# Altium PCB Copy of main - shifted.PcbDoc (part 13 of 15)
Units mil, origin at the board's own origin, x right, y up, seen from the top; angles counter-clockwise.
Board outline 8394.55 x 5164.44 mil, 7 copper layers (Top Layer 1, Layer 2, Layer 3, Unused, Layer 4_pow, Layer 5_gnd, Bottom 6+gnd), stack 46.112 mil thick; 363 components, 409 nets, 1750 pads, 991 vias.
Unrouted connection lines stored in the file: 111.
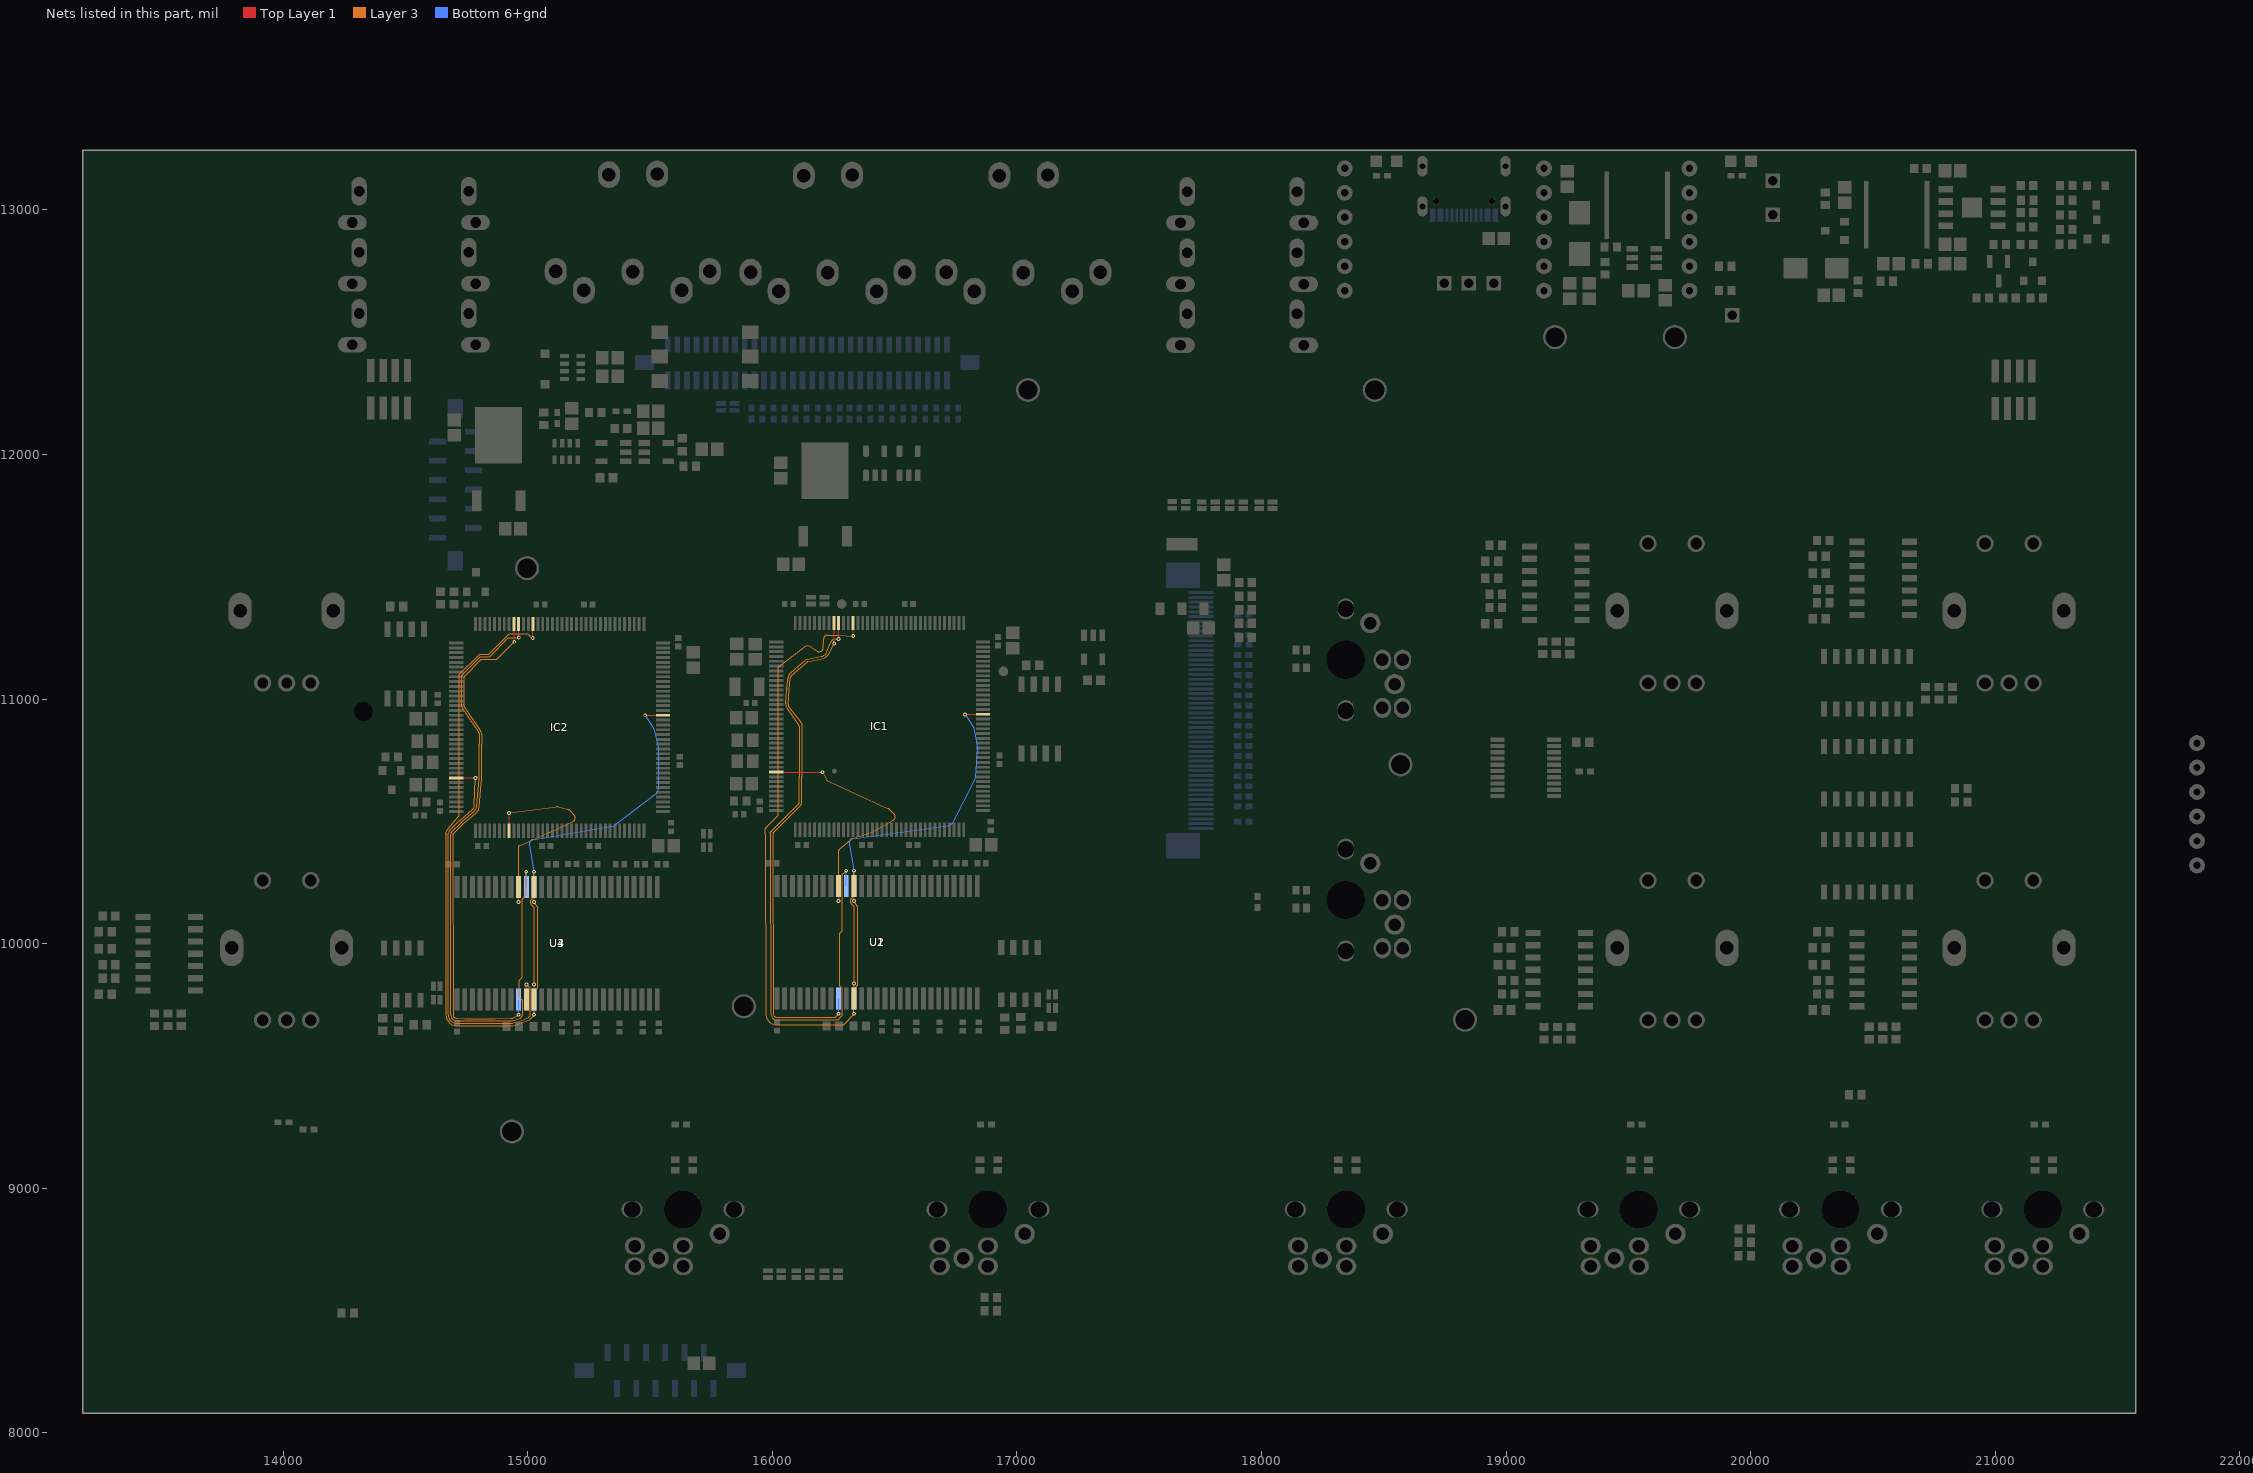
[diagram p16: the nets of this part, all layers, seen from the top]

## Via types
v1: diameter 15.75, hole 7.87, Top Layer 1 to Bottom 6+gnd, tented both sides, 923 vias
v2: diameter 27.56, hole 11.81, Top Layer 1 to Bottom 6+gnd, 45 vias
v3: diameter 23.62/23.62/23.62/23.62/23.62/23.62/23.62 (per signal layer), hole 12, Top Layer 1 to Bottom 6+gnd, tented top, 10 vias
v4: diameter 15.75, hole 7.87, Top Layer 1 to Bottom 6+gnd, 10 vias
v5: diameter 23.62/23.62/23.62/23.62/23.62/23.62/23.62 (per signal layer), hole 12, Top Layer 1 to Bottom 6+gnd, tented bottom, 3 vias

## Nets (pads, with @x,y where several pads share a name; then routed paths per layer and width w, separated by ;. In a path a pad name is that pad's centre, name@x,y a point inside that pad or via, vN(x,y) a via of type N, cw(c..) or ccw(c..) an arc to the next point about the centre after c; other vN are vias at no path point) (continued)
SDCKE_1_6: IC1.135 U2.37 | length 4722.9
  Top Layer 1 w5: v1(16270.57,11246.07) 16270.7,11246.2 16270.7,11311.45 IC1.135@16270.83,11311.57
  Layer 3 w5: 15993.16,10458.03 16108.07,10572.94 ; 16108.57,11136.34 16072.48,11104.85 ; 16108.58,11136.34 16131.89,11156.63 cw(c16148.55,11137.5) 16143.19,11162.3 16199.56,11174.48 ; 16109.53,10682.18 cw(c16094.16,10682.09) 16109.53,10681.99 ; 16268.26,9689.59 16285.8,9707.13 16285.8,9814.04 ; v1(16270.57,11246.07) 16250.25,11242.36 ccw(c16253.01,11227.24) 16238.61,11232.6 16225.24,11196.71 ; 16276.06,9827.93 ccw(c16281.06,9827.93) 16277.51,9824.4 ; v1(16301.92,10298.31) 16285.8,10282.18 16285.8,10052.46 16276.06,10042.72 16276.06,9827.92 ; 15991.7,10450.32 cw(c16001.7,10450.34) 15991.7,10450.45 ; 15991.7,10450.32 cw(c16001.7,10450.34) 15991.7,10450.45 ; 15991.7,10450.32 cw(c16001.7,10450.34) 15991.7,10450.45 ; 15991.7,10450.32 cw(c16001.7,10450.34) 15991.7,10450.45 ; 15991.7,10450.32 cw(c16001.7,10450.34) 15991.7,10450.45 ; 15991.7,10450.32 cw(c16001.7,10450.34) 15991.7,10450.45 ; 15991.7,10450.32 cw(c16001.7,10450.34) 15991.7,10450.45 ; 15991.7,10450.32 cw(c16001.7,10450.34) 15991.7,10450.45 ; 15991.7,10450.32 15993.2,9713.56 ; 15991.7,10450.45 15991.72,10454.56 ; 15991.72,10454.56 cw(c15996.72,10454.52) 15993.14,10458.01 ; 15991.72,10454.56 cw(c15996.72,10454.52) 15993.14,10458 ; 15991.72,10454.56 cw(c15996.72,10454.52) 15993.14,10458 ; 15991.72,10454.56 cw(c15996.72,10454.52) 15993.14,10458 ; 15991.72,10454.56 cw(c15996.72,10454.52) 15993.14,10458 ; 15991.72,10454.56 cw(c15996.72,10454.52) 15993.14,10458 ; 15991.72,10454.56 cw(c15996.72,10454.52) 15993.14,10458 ; 15991.72,10454.56 cw(c15996.72,10454.52) 15993.14,10458 ; 15991.72,10454.56 cw(c15996.72,10454.52) 15993.14,10458 ; 15991.72,10454.56 cw(c15996.72,10454.52) 15993.14,10458 ; 15991.72,10454.56 cw(c15996.72,10454.52) 15993.14,10458 ; 15991.72,10454.56 cw(c15996.72,10454.52) 15993.14,10458 ; 15991.72,10454.56 cw(c15996.72,10454.52) 15993.14,10458 ; 15991.72,10454.56 cw(c15996.72,10454.52) 15993.14,10458 ; 15991.72,10454.56 cw(c15996.72,10454.52) 15993.14,10458 ; 15991.72,10454.56 cw(c15996.72,10454.52) 15993.14,10458 ; 15993.2,9713.57 ccw(c16018.57,9713.62) 16018.47,9688.24 ; 15993.2,9713.57 ccw(c16018.57,9713.62) 16018.47,9688.24 ; 15993.2,9713.57 ccw(c16018.57,9713.62) 16018.47,9688.24 ; 15993.2,9713.57 ccw(c16018.57,9713.62) 16018.47,9688.24 ; 15993.2,9713.57 ccw(c16018.57,9713.62) 16018.47,9688.24 ; 15993.2,9713.57 ccw(c16018.57,9713.62) 16018.47,9688.24 ; 15993.2,9713.57 ccw(c16018.57,9713.62) 16018.47,9688.24 ; 15993.2,9713.57 ccw(c16018.57,9713.62) 16018.47,9688.24 ; 15993.2,9713.57 ccw(c16018.57,9713.62) 16018.47,9688.24 ; 15993.2,9713.57 ccw(c16018.57,9713.62) 16018.47,9688.24 ; 15993.2,9713.57 ccw(c16018.57,9713.62) 16018.47,9688.24 ; 15993.2,9713.57 ccw(c16018.57,9713.62) 16018.47,9688.24 ; 15993.2,9713.57 ccw(c16018.57,9713.62) 16018.47,9688.24 ; 15993.2,9713.57 ccw(c16018.57,9713.62) 16018.47,9688.24 ; 15993.2,9713.57 ccw(c16018.57,9713.62) 16018.47,9688.24 ; 15993.2,9713.57 ccw(c16018.57,9713.62) 16018.47,9688.24 ; 16018.47,9688.24 16049.88,9688.13 16252.99,9688.13 16264.76,9688.16 ; 16053.89,10980.39 ccw(c16079.21,10978.64) 16058.42,10964.09 ; 16053.89,10980.39 ccw(c16079.21,10978.64) 16058.42,10964.09 ; 16053.89,10980.39 ccw(c16079.21,10978.64) 16058.42,10964.09 ; 16053.89,10980.39 ccw(c16079.21,10978.64) 16058.42,10964.09 ; 16053.89,10980.39 ccw(c16079.21,10978.64) 16058.42,10964.09 ; 16053.89,10980.39 ccw(c16079.21,10978.64) 16058.42,10964.09 ; 16053.89,10980.39 ccw(c16079.21,10978.64) 16058.42,10964.09 ; 16053.89,10980.39 ccw(c16079.21,10978.64) 16058.42,10964.09 ; 16053.89,10980.39 ccw(c16079.21,10978.64) 16058.42,10964.09 ; 16053.89,10980.39 ccw(c16079.21,10978.64) 16058.42,10964.09 ; 16053.89,10980.39 ccw(c16079.21,10978.64) 16058.42,10964.09 ; 16053.89,10980.39 ccw(c16079.21,10978.64) 16058.42,10964.09 ; 16053.89,10980.39 ccw(c16079.21,10978.64) 16058.42,10964.09 ; 16053.89,10980.39 ccw(c16079.21,10978.64) 16058.42,10964.09 ; 16053.89,10980.39 ccw(c16079.21,10978.64) 16058.42,10964.09 ; 16053.89,10980.39 ccw(c16079.21,10978.64) 16058.42,10964.09 ; 16053.89,10980.39 16058.06,11040.51 cw(c16093.35,11038.08) 16058.24,11042.42 16063.98,11088.82 ; 16058.42,10964.09 16107.6,10893.68 ccw(c16111.72,10896.51) 16108.11,10893.05 cw(c16104.49,10889.6) 16109.49,10889.6 16109.54,10682.17 ; 16063.98,11088.82 cw(c16089.16,11085.73) 16072.48,11104.85 ; 16063.98,11088.82 cw(c16089.16,11085.73) 16072.48,11104.85 ; 16063.98,11088.82 cw(c16089.16,11085.73) 16072.48,11104.85 ; 16063.98,11088.82 cw(c16089.16,11085.73) 16072.48,11104.85 ; 16063.98,11088.82 cw(c16089.16,11085.73) 16072.48,11104.85 ; 16063.98,11088.82 cw(c16089.16,11085.73) 16072.48,11104.85 ; 16063.98,11088.82 cw(c16089.16,11085.73) 16072.48,11104.85 ; 16063.98,11088.82 cw(c16089.16,11085.73) 16072.48,11104.85 ; 16063.98,11088.82 cw(c16089.16,11085.73) 16072.48,11104.85 ; 16063.98,11088.82 cw(c16089.16,11085.73) 16072.48,11104.85 ; 16063.98,11088.82 cw(c16089.16,11085.73) 16072.48,11104.85 ; 16063.98,11088.82 cw(c16089.16,11085.73) 16072.48,11104.85 ; 16063.98,11088.82 cw(c16089.16,11085.73) 16072.48,11104.85 ; 16063.98,11088.82 cw(c16089.16,11085.73) 16072.48,11104.85 ; 16063.98,11088.82 cw(c16089.16,11085.73) 16072.48,11104.85 ; 16063.98,11088.82 cw(c16089.16,11085.73) 16072.48,11104.85 ; 16108.1,10572.97 ccw(c16104.5,10576.44) 16109.5,10576.44 ; 16108.1,10572.97 ccw(c16104.5,10576.44) 16109.5,10576.44 ; 16108.1,10572.97 ccw(c16104.5,10576.44) 16109.5,10576.44 ; 16108.1,10572.97 ccw(c16104.5,10576.44) 16109.5,10576.44 ; 16108.1,10572.97 ccw(c16104.5,10576.44) 16109.5,10576.44 ; 16108.1,10572.97 ccw(c16104.5,10576.44) 16109.5,10576.44 ; 16108.1,10572.97 ccw(c16104.5,10576.44) 16109.5,10576.44 ; 16108.1,10572.97 ccw(c16104.5,10576.44) 16109.5,10576.44 ; 16108.1,10572.97 ccw(c16104.5,10576.44) 16109.5,10576.44 ; 16108.1,10572.97 ccw(c16104.5,10576.44) 16109.5,10576.44 ; 16108.1,10572.97 ccw(c16104.5,10576.44) 16109.5,10576.44 ; 16108.1,10572.97 ccw(c16104.5,10576.44) 16109.5,10576.44 ; 16108.1,10572.97 ccw(c16104.5,10576.44) 16109.5,10576.44 ; 16108.1,10572.97 ccw(c16104.5,10576.44) 16109.5,10576.44 ; 16108.1,10572.97 ccw(c16104.5,10576.44) 16109.5,10576.44 ; 16108.1,10572.97 ccw(c16104.5,10576.44) 16109.5,10576.44 ; 16109.5,10576.44 16109.54,10681.99 ; 16109.53,10681.99 ccw(c16094.16,10682.09) 16109.53,10682.17 ; 16109.53,10681.99 ccw(c16094.16,10682.09) 16109.53,10682.17 ; 16109.53,10681.99 ccw(c16094.16,10682.09) 16109.53,10682.17 ; 16109.53,10681.99 ccw(c16094.16,10682.09) 16109.53,10682.17 ; 16109.53,10681.99 ccw(c16094.16,10682.09) 16109.53,10682.17 ; 16109.53,10681.99 ccw(c16094.16,10682.09) 16109.53,10682.17 ; 16109.53,10681.99 ccw(c16094.16,10682.09) 16109.53,10682.17 ; 16109.53,10681.99 ccw(c16094.16,10682.09) 16109.53,10682.17 ; 16109.53,10681.99 ccw(c16094.16,10682.09) 16109.53,10682.17 ; 16109.53,10681.99 ccw(c16094.16,10682.09) 16109.53,10682.17 ; 16109.53,10681.99 ccw(c16094.16,10682.09) 16109.53,10682.17 ; 16109.53,10681.99 ccw(c16094.16,10682.09) 16109.53,10682.17 ; 16109.53,10681.99 ccw(c16094.16,10682.09) 16109.53,10682.17 ; 16109.53,10681.99 ccw(c16094.16,10682.09) 16109.53,10682.17 ; 16109.53,10681.99 ccw(c16094.16,10682.09) 16109.53,10682.17 ; 16199.56,11174.48 ccw(c16192.09,11209.06) 16225.24,11196.71 ; 16199.56,11174.48 ccw(c16192.09,11209.06) 16225.24,11196.71 ; 16199.56,11174.48 ccw(c16192.09,11209.06) 16225.24,11196.71 ; 16199.56,11174.48 ccw(c16192.09,11209.06) 16225.24,11196.71 ; 16199.56,11174.48 ccw(c16192.09,11209.06) 16225.24,11196.71 ; 16199.56,11174.48 ccw(c16192.09,11209.06) 16225.24,11196.71 ; 16199.56,11174.48 ccw(c16192.09,11209.06) 16225.24,11196.71 ; 16199.56,11174.48 ccw(c16192.09,11209.06) 16225.24,11196.71 ; 16199.56,11174.48 ccw(c16192.09,11209.06) 16225.24,11196.71 ; 16199.56,11174.48 ccw(c16192.09,11209.06) 16225.24,11196.71 ; 16199.56,11174.48 ccw(c16192.09,11209.06) 16225.24,11196.71 ; 16199.56,11174.48 ccw(c16192.09,11209.06) 16225.24,11196.71 ; 16199.56,11174.48 ccw(c16192.09,11209.06) 16225.24,11196.71 ; 16199.56,11174.48 ccw(c16192.09,11209.06) 16225.24,11196.71 ; 16199.56,11174.48 ccw(c16192.09,11209.06) 16225.24,11196.71 ; 16199.56,11174.48 ccw(c16192.09,11209.06) 16225.24,11196.71 ; 16264.76,9688.16 ccw(c16264.75,9693.16) 16268.23,9689.57 ; 16264.76,9688.16 ccw(c16264.75,9693.16) 16268.23,9689.57 ; 16264.76,9688.16 ccw(c16264.75,9693.16) 16268.23,9689.57 ; 16264.76,9688.16 ccw(c16264.75,9693.16) 16268.23,9689.57 ; 16264.76,9688.16 ccw(c16264.75,9693.16) 16268.23,9689.57 ; 16264.76,9688.16 ccw(c16264.75,9693.16) 16268.23,9689.57 ; 16264.76,9688.16 ccw(c16264.75,9693.16) 16268.23,9689.57 ; 16264.76,9688.16 ccw(c16264.75,9693.16) 16268.23,9689.57 ; 16264.76,9688.16 ccw(c16264.75,9693.16) 16268.23,9689.57 ; 16264.76,9688.16 ccw(c16264.75,9693.16) 16268.23,9689.57 ; 16264.76,9688.16 ccw(c16264.75,9693.16) 16268.23,9689.57 ; 16264.76,9688.16 ccw(c16264.75,9693.16) 16268.23,9689.57 ; 16264.76,9688.16 ccw(c16264.75,9693.16) 16268.23,9689.57 ; 16264.76,9688.16 ccw(c16264.75,9693.16) 16268.23,9689.57 ; 16264.76,9688.16 ccw(c16264.75,9693.16) 16268.23,9689.57 ; 16264.76,9688.16 ccw(c16264.75,9693.16) 16268.23,9689.57 ; 16276.06,9827.92 ccw(c16281.06,9827.93) 16277.51,9824.4 ; 16276.06,9827.92 ccw(c16281.06,9827.93) 16277.51,9824.4 ; 16276.06,9827.92 ccw(c16281.06,9827.93) 16277.51,9824.4 ; 16276.06,9827.92 ccw(c16281.06,9827.93) 16277.51,9824.4 ; 16276.06,9827.92 ccw(c16281.06,9827.93) 16277.51,9824.4 ; 16276.06,9827.92 ccw(c16281.06,9827.93) 16277.51,9824.4 ; 16276.06,9827.92 ccw(c16281.06,9827.93) 16277.51,9824.4 ; 16276.06,9827.92 ccw(c16281.06,9827.93) 16277.51,9824.4 ; 16276.06,9827.92 ccw(c16281.06,9827.93) 16277.51,9824.4 ; 16276.06,9827.92 ccw(c16281.06,9827.93) 16277.51,9824.4 ; 16276.06,9827.92 ccw(c16281.06,9827.93) 16277.51,9824.4 ; 16276.06,9827.92 ccw(c16281.06,9827.93) 16277.51,9824.4 ; 16276.06,9827.92 ccw(c16281.06,9827.93) 16277.51,9824.4 ; 16276.06,9827.92 ccw(c16281.06,9827.93) 16277.51,9824.4 ; 16276.06,9827.92 ccw(c16281.06,9827.93) 16277.51,9824.4 ; 16277.51,9824.4 16284.35,9817.52 ; 16284.35,9817.52 cw(c16280.8,9814) 16285.8,9814.09 ; 16284.35,9817.52 cw(c16280.8,9814) 16285.8,9814.09 ; 16284.35,9817.52 cw(c16280.8,9814) 16285.8,9814.09 ; 16284.35,9817.52 cw(c16280.8,9814) 16285.8,9814.09 ; 16284.35,9817.52 cw(c16280.8,9814) 16285.8,9814.09 ; 16284.35,9817.52 cw(c16280.8,9814) 16285.8,9814.09 ; 16284.35,9817.52 cw(c16280.8,9814) 16285.8,9814.09 ; 16284.35,9817.52 cw(c16280.8,9814) 16285.8,9814.09 ; 16284.35,9817.52 cw(c16280.8,9814) 16285.8,9814.09 ; 16284.35,9817.52 cw(c16280.8,9814) 16285.8,9814.09 ; 16284.35,9817.52 cw(c16280.8,9814) 16285.8,9814.09 ; 16284.35,9817.52 cw(c16280.8,9814) 16285.8,9814.09 ; 16284.35,9817.52 cw(c16280.8,9814) 16285.8,9814.09 ; 16284.35,9817.52 cw(c16280.8,9814) 16285.8,9814.09 ; 16284.35,9817.52 cw(c16280.8,9814) 16285.8,9814.09 ; 16284.35,9817.52 cw(c16280.8,9814) 16285.8,9814.09
  Bottom 6+gnd w5: U2.37@16302.17,10236.22 v1@16302.17,10298.06
SDCKE_01_7: IC2.29 U3.37 | length 1647.9
  Top Layer 1 w5: IC2.29@14707.11,10677.92 v1@14785.84,10677.92 ; U3.37@14993.87,9771.4 v1@14993.87,9833.24
  Layer 3 w5: 14673.4,10445.04 14673.4,10447.12 cw(c14678.4,10447.09) 14673.51,10448.17 14674.01,10450.43 cw(c14698.42,10445.04) 14680.75,10462.72 14721.9,10503.84 cw(c14746.65,10479.09) 14723.76,10505.57 14775.77,10550.55 ccw(c14765.72,10562.18) 14781.08,10561.54 v1(14785.86,10677.89) ; 14674.9,10443.52 14674.9,9709.36 ccw(c14710.27,9709.43) 14710.33,9674.05 14741.44,9674.05 14741.56,9673.94 ; 14741.59,9673.94 14867.7,9673.94 ; 14867.73,9673.94 14930.72,9674.1 ccw(c14930.63,9709.47) 14941.66,9675.86 14970.06,9685.21 ; 14971.21,9685.62 14999.13,9696.33 ccw(c14993.62,9710.69) 15004.57,9699.89 15007.55,9702.91 ; v1(14994.11,9833.49) 15008.99,9818.6 15008.99,9704.36 15007.57,9702.94
SDCKE_11_7: IC2.135 U4.37 | length 2788.7
  Top Layer 1 w5: IC2.135@14962.53,11307.38 14962.83,11307.08 14962.83,11252.37 v1(14963.14,11252.06)
  Layer 3 w5: 14729.85,11096.08 14729.85,11090.84 ccw(c14744.85,11090.76) 14729.85,11090.76 14729.85,10971.7 ccw(c14744.85,10971.71) 14732.36,10963.4 14798.6,10863.86 cw(c14785.86,10855.26) 14801.24,10855.26 14801.24,10815.26 14801.24,10677.9 cw(c14785.86,10677.9) 14801.19,10676.74 14801.19,10676.67 cw(c14785.86,10677.89) 14801.18,10676.56 14790.99,10559.97 cw(c14765.72,10562.18) 14782.31,10542.98 14730.31,10498.01 ccw(c14746.65,10479.09) 14728.98,10496.78 14687.82,10455.65 ccw(c14698.42,10445.04) 14683.42,10445.01 14684.62,10443.82 cw(c14674.9,10441.47) 14684.9,10441.47 14684.9,9709.38 ccw(c14710.27,9709.43) 14710.36,9684.05 14741.47,9684.05 14741.58,9683.94 ccw(c14741.65,9709.31) 14741.65,9683.94 14867.67,9683.94 14930.73,9684.1 ccw(c14930.63,9709.47) 14938.56,9685.37 14966.9,9694.7 ccw(c14962.12,9709.31) 14977.5,9709.38 14977.45,9767.94 ccw(c14972.45,9767.94) 14976.08,9771.38 14976.03,9771.43 14964.85,9782.61 14964.85,9849.63 14977.5,9862.28 14977.5,10182.28 14978.94,10183.72 14992.16,10196.98 ccw(c14988.62,10200.52) 14993.62,10200.43 v1(14993.62,10294.12) ; 14729.88,11096.11 cw(c14734.88,11096.08) 14730.06,11097.41 14806.36,11173.71 14844.12,11173.71 14920.41,11250.01 14961.08,11250.01 v1(14963.14,11252.06)
  Bottom 6+gnd w5: U4.37@14993.87,10232.03 v1@14993.87,10293.87
SDCLK1_7: IC2.93 U3.38 U4.38 | length 2925
  Top Layer 1 w5: U3.38@15025.36,9771.4 v1@15025.36,9833.24 ; v1@15480.01,10933.84 IC2.93@15552.61,10933.84
  Layer 3 w5: v1(15025.12,10294.12) 15025.61,10293.63 15025.61,10195.56 ; v1(15025.61,9833.49) 15025.61,10145.64 ; 15024.15,10149.12 cw(c15020.61,10145.59) 15025.61,10145.68 ; 15024.15,10149.12 cw(c15020.61,10145.59) 15025.61,10145.68 ; 15024.15,10149.12 cw(c15020.61,10145.59) 15025.61,10145.68 ; 15024.15,10149.12 cw(c15020.61,10145.59) 15025.61,10145.68 ; 15024.15,10149.12 cw(c15020.61,10145.59) 15025.61,10145.68 ; 15024.15,10149.12 cw(c15020.61,10145.59) 15025.61,10145.68 ; 15024.15,10149.12 cw(c15020.61,10145.59) 15025.61,10145.68 ; 15024.15,10149.12 cw(c15020.61,10145.59) 15025.61,10145.68 ; 15024.15,10149.12 cw(c15020.61,10145.59) 15025.61,10145.68 ; 15024.15,10149.12 cw(c15020.61,10145.59) 15025.61,10145.68 ; 15024.15,10149.12 cw(c15020.61,10145.59) 15025.61,10145.68 ; 15024.15,10149.12 cw(c15020.61,10145.59) 15025.61,10145.68 ; 15024.15,10149.12 cw(c15020.61,10145.59) 15025.61,10145.68 ; 15024.15,10149.12 cw(c15020.61,10145.59) 15025.61,10145.68 ; 15024.15,10149.12 cw(c15020.61,10145.59) 15025.61,10145.68 ; 15024.15,10149.12 cw(c15020.61,10145.59) 15025.61,10145.68 ; 15024.15,10149.12 15014.22,10159.1 cw(c15025.12,10169.94) 15013.59,10180.12 15024.35,10192.29 ; 15024.35,10192.29 ccw(c15020.61,10195.6) 15025.61,10195.51 ; 15024.35,10192.29 ccw(c15020.61,10195.6) 15025.61,10195.51 ; 15024.35,10192.29 ccw(c15020.61,10195.6) 15025.61,10195.51 ; 15024.35,10192.29 ccw(c15020.61,10195.6) 15025.61,10195.51 ; 15024.35,10192.29 ccw(c15020.61,10195.6) 15025.61,10195.51 ; 15024.35,10192.29 ccw(c15020.61,10195.6) 15025.61,10195.51 ; 15024.35,10192.29 ccw(c15020.61,10195.6) 15025.61,10195.51 ; 15024.35,10192.29 ccw(c15020.61,10195.6) 15025.61,10195.51 ; 15024.35,10192.29 ccw(c15020.61,10195.6) 15025.61,10195.51 ; 15024.35,10192.29 ccw(c15020.61,10195.6) 15025.61,10195.51 ; 15024.35,10192.29 ccw(c15020.61,10195.6) 15025.61,10195.51 ; 15024.35,10192.29 ccw(c15020.61,10195.6) 15025.61,10195.51 ; 15024.35,10192.29 ccw(c15020.61,10195.6) 15025.61,10195.51 ; 15024.35,10192.29 ccw(c15020.61,10195.6) 15025.61,10195.51 ; 15024.35,10192.29 ccw(c15020.61,10195.6) 15025.61,10195.51 ; 15024.35,10192.29 ccw(c15020.61,10195.6) 15025.61,10195.51
  Bottom 6+gnd w5: v1@15024.87,10294.36 v1(15025.12,10294.12) U4.38@15025.12,10232.28 ; v1@15479.68,10934.01 v1(15479.93,10933.76) 15512.85,10882.73 cw(c15499.93,10874.39) 15514.8,10878.3 15534.14,10804.64 cw(c15499.93,10795.65) 15535.3,10795.65 15535.3,10638.17 ; 15006.46,10406.96 cw(c15021.64,10409.41) 15019.12,10424.58 ; 15006.46,10406.96 cw(c15021.64,10409.41) 15019.12,10424.58 ; 15006.46,10406.96 cw(c15021.64,10409.41) 15019.12,10424.58 ; 15006.46,10406.96 cw(c15021.64,10409.41) 15019.12,10424.58 ; 15006.46,10406.96 cw(c15021.64,10409.41) 15019.12,10424.58 ; 15006.46,10406.96 cw(c15021.64,10409.41) 15019.12,10424.58 ; 15006.46,10406.96 cw(c15021.64,10409.41) 15019.12,10424.58 ; 15006.46,10406.96 cw(c15021.64,10409.41) 15019.12,10424.58 ; 15006.46,10406.96 cw(c15021.64,10409.41) 15019.12,10424.58 ; 15006.46,10406.96 cw(c15021.64,10409.41) 15019.12,10424.58 ; 15006.46,10406.96 cw(c15021.64,10409.41) 15019.12,10424.58 ; 15006.46,10406.96 cw(c15021.64,10409.41) 15019.12,10424.58 ; 15006.46,10406.96 cw(c15021.64,10409.41) 15019.12,10424.58 ; 15006.46,10406.96 cw(c15021.64,10409.41) 15019.12,10424.58 ; 15006.46,10406.96 cw(c15021.64,10409.41) 15019.12,10424.58 ; 15006.46,10406.96 cw(c15021.64,10409.41) 15019.12,10424.58 ; 15006.46,10406.96 v1@15024.93,10294.89 ; 15019.12,10424.58 15342.24,10479.52 ; v1@15024.93,10294.88 ccw(c15029.87,10295.67) v1(15025.12,10294.12) ; v1@15024.93,10294.88 ccw(c15029.87,10295.67) v1(15025.12,10294.12) ; v1@15024.93,10294.88 ccw(c15029.87,10295.67) v1(15025.12,10294.12) ; v1@15024.93,10294.88 ccw(c15029.87,10295.67) v1(15025.12,10294.12) ; v1@15024.93,10294.88 ccw(c15029.87,10295.67) v1(15025.12,10294.12) ; v1@15024.93,10294.88 ccw(c15029.87,10295.67) v1(15025.12,10294.12) ; v1@15024.93,10294.88 ccw(c15029.87,10295.67) v1(15025.12,10294.12) ; v1@15024.93,10294.88 ccw(c15029.87,10295.67) v1(15025.12,10294.12) ; v1@15024.93,10294.88 ccw(c15029.87,10295.67) v1(15025.12,10294.12) ; v1@15024.93,10294.88 ccw(c15029.87,10295.67) v1(15025.12,10294.12) ; v1@15024.93,10294.88 ccw(c15029.87,10295.67) v1(15025.12,10294.12) ; v1@15024.93,10294.88 ccw(c15029.87,10295.67) v1(15025.12,10294.12) ; v1@15024.93,10294.88 ccw(c15029.87,10295.67) v1(15025.12,10294.12) ; v1@15024.93,10294.88 ccw(c15029.87,10295.67) v1(15025.12,10294.12) ; v1@15024.93,10294.88 ccw(c15029.87,10295.67) v1(15025.12,10294.12) ; v1@15024.93,10294.89 ccw(c15029.87,10295.67) v1(15025.12,10294.12) ; 15342.24,10479.52 ccw(c15336.31,10514.39) 15357.63,10486.17 ; 15342.24,10479.52 ccw(c15336.31,10514.39) 15357.63,10486.17 ; 15342.24,10479.52 ccw(c15336.31,10514.39) 15357.63,10486.17 ; 15342.24,10479.52 ccw(c15336.31,10514.39) 15357.63,10486.17 ; 15342.24,10479.52 ccw(c15336.31,10514.39) 15357.63,10486.17 ; 15342.24,10479.52 ccw(c15336.31,10514.39) 15357.63,10486.17 ; 15342.24,10479.52 ccw(c15336.31,10514.39) 15357.63,10486.17 ; 15342.24,10479.52 ccw(c15336.31,10514.39) 15357.63,10486.17 ; 15342.24,10479.52 ccw(c15336.31,10514.39) 15357.63,10486.17 ; 15342.24,10479.52 ccw(c15336.31,10514.39) 15357.63,10486.17 ; 15342.24,10479.52 ccw(c15336.31,10514.39) 15357.63,10486.17 ; 15342.24,10479.52 ccw(c15336.31,10514.39) 15357.63,10486.17 ; 15342.24,10479.52 ccw(c15336.31,10514.39) 15357.63,10486.17 ; 15342.24,10479.52 ccw(c15336.31,10514.39) 15357.63,10486.17 ; 15342.24,10479.52 ccw(c15336.31,10514.39) 15357.63,10486.17 ; 15342.24,10479.52 ccw(c15336.31,10514.39) 15357.63,10486.17 ; 15357.63,10486.17 15521.27,10609.96 ; 15521.27,10609.96 ccw(c15499.93,10638.17) 15535.3,10638.17 ; 15521.27,10609.96 ccw(c15499.93,10638.17) 15535.3,10638.17 ; 15521.27,10609.96 ccw(c15499.93,10638.17) 15535.3,10638.17 ; 15521.27,10609.96 ccw(c15499.93,10638.17) 15535.3,10638.17 ; 15521.27,10609.96 ccw(c15499.93,10638.17) 15535.3,10638.17 ; 15521.27,10609.96 ccw(c15499.93,10638.17) 15535.3,10638.17 ; 15521.27,10609.96 ccw(c15499.93,10638.17) 15535.3,10638.17 ; 15521.27,10609.96 ccw(c15499.93,10638.17) 15535.3,10638.17 ; 15521.27,10609.96 ccw(c15499.93,10638.17) 15535.3,10638.17 ; 15521.27,10609.96 ccw(c15499.93,10638.17) 15535.3,10638.17 ; 15521.27,10609.96 ccw(c15499.93,10638.17) 15535.3,10638.17 ; 15521.27,10609.96 ccw(c15499.93,10638.17) 15535.3,10638.17 ; 15521.27,10609.96 ccw(c15499.93,10638.17) 15535.3,10638.17 ; 15521.27,10609.96 ccw(c15499.93,10638.17) 15535.3,10638.17 ; 15521.27,10609.96 ccw(c15499.93,10638.17) 15535.3,10638.17 ; 15521.27,10609.96 ccw(c15499.93,10638.17) 15535.3,10638.17
SDCLK_6: IC1.93 U1.38 U2.38 | length 1937.3
  Top Layer 1 w5: U1.38@16333.66,9775.59 v1@16333.66,9837.43 ; U1.38@16333.91,9775.83 v1(16333.91,9837.68) ; U1.38@16334.15,9775.59 v1@16334.15,9837.43 ; v1(16788.23,10936.97) 16788.76,10937.5 16860.38,10937.5 IC1.93@16860.91,10938.03
  Layer 3 w5: v1(16333.42,10298.31) 16333.91,10297.82 16333.91,10199.75 ; v1(16333.91,9837.68) 16333.91,10149.83 ; 16332.45,10153.31 cw(c16328.91,10149.78) 16333.91,10149.87 ; 16332.45,10153.31 cw(c16328.91,10149.78) 16333.91,10149.87 ; 16332.45,10153.31 cw(c16328.91,10149.78) 16333.91,10149.87 ; 16332.45,10153.31 cw(c16328.91,10149.78) 16333.91,10149.87 ; 16332.45,10153.31 cw(c16328.91,10149.78) 16333.91,10149.87 ; 16332.45,10153.31 cw(c16328.91,10149.78) 16333.91,10149.87 ; 16332.45,10153.31 cw(c16328.91,10149.78) 16333.91,10149.87 ; 16332.45,10153.31 cw(c16328.91,10149.78) 16333.91,10149.87 ; 16332.45,10153.31 cw(c16328.91,10149.78) 16333.91,10149.87 ; 16332.45,10153.31 cw(c16328.91,10149.78) 16333.91,10149.87 ; 16332.45,10153.31 cw(c16328.91,10149.78) 16333.91,10149.87 ; 16332.45,10153.31 cw(c16328.91,10149.78) 16333.91,10149.87 ; 16332.45,10153.31 cw(c16328.91,10149.78) 16333.91,10149.87 ; 16332.45,10153.31 cw(c16328.91,10149.78) 16333.91,10149.87 ; 16332.45,10153.31 cw(c16328.91,10149.78) 16333.91,10149.87 ; 16332.45,10153.31 cw(c16328.91,10149.78) 16333.91,10149.87 ; 16332.45,10153.31 16322.52,10163.28 cw(c16333.42,10174.13) 16321.89,10184.31 16332.65,10196.48 ; 16332.65,10196.48 ccw(c16328.91,10199.79) 16333.91,10199.7 ; 16332.65,10196.48 ccw(c16328.91,10199.79) 16333.91,10199.7 ; 16332.65,10196.48 ccw(c16328.91,10199.79) 16333.91,10199.7 ; 16332.65,10196.48 ccw(c16328.91,10199.79) 16333.91,10199.7 ; 16332.65,10196.48 ccw(c16328.91,10199.79) 16333.91,10199.7 ; 16332.65,10196.48 ccw(c16328.91,10199.79) 16333.91,10199.7 ; 16332.65,10196.48 ccw(c16328.91,10199.79) 16333.91,10199.7 ; 16332.65,10196.48 ccw(c16328.91,10199.79) 16333.91,10199.7 ; 16332.65,10196.48 ccw(c16328.91,10199.79) 16333.91,10199.7 ; 16332.65,10196.48 ccw(c16328.91,10199.79) 16333.91,10199.7 ; 16332.65,10196.48 ccw(c16328.91,10199.79) 16333.91,10199.7 ; 16332.65,10196.48 ccw(c16328.91,10199.79) 16333.91,10199.7 ; 16332.65,10196.48 ccw(c16328.91,10199.79) 16333.91,10199.7 ; 16332.65,10196.48 ccw(c16328.91,10199.79) 16333.91,10199.7 ; 16332.65,10196.48 ccw(c16328.91,10199.79) 16333.91,10199.7 ; 16332.65,10196.48 ccw(c16328.91,10199.79) 16333.91,10199.7
  Bottom 6+gnd w5: v1(16333.42,10298.31) 16314.77,10411.09 cw(c16329.94,10413.6) 16327.91,10428.84 16715.06,10482.16 ccw(c16710.24,10517.2) 16741.7,10501.03 16828.36,10669.08 16828.41,10669.17 ; v1(16333.42,10298.31) cw(c16328.64,10296.84) 16333.64,10296.85 16333.64,10278.72 U2.38@16333.66,10236.22 ; v1(16788.23,10936.97) 16788.39,10936.97 16788.68,10937.26 16820.86,10887.36 16821.53,10886.54 16823.29,10884.77 16823.29,10882.16 16823.39,10881.16 16838.59,10806.77 cw(c16803.93,10799.69) 16839.23,10797.5 16832.3,10683.33 cw(c16796.99,10685.43) 16828.41,10669.18
SDNCAS1_7: IC2.132 U3.17 U4.17 | length 2842.8
  Top Layer 1 w5: v1(15019.85,11249.63) 15020.72,11250.49 15020.72,11306.52 IC2.132@15021.64,11307.38 ; v1@15025.36,10170.19 U3.17@15025.36,10232.03
  Layer 3 w5: 14867.73,9663.94 14741.61,9663.94 cw(c14741.61,9673.94) 14741.52,9663.94 14741.4,9664.05 14710.27,9664.05 cw(c14710.27,9709.43) 14664.9,9709.35 14663.4,10444.94 14663.4,10447.17 cw(c14678.4,10447.09) 14663.75,10450.33 14664.25,10452.59 cw(c14698.42,10445.04) 14671.81,10467.77 14713.83,10516.98 ccw(c14694.82,10533.22) 14715.02,10518.48 14718.89,10523.79 ccw(c14714.85,10526.73) 14719.85,10526.7 14719.85,11090.76 cw(c14744.85,11090.76) 14719.85,11090.87 14719.85,11101.34 14802.9,11184.39 14840.66,11184.39 14923.7,11267.44 14999.13,11267.44 15016.94,11249.63 v1(15019.85,11249.63) ; 14867.75,9663.94 14867.91,9664.1 14930.76,9664.1 ccw(c14930.63,9709.47) 14944.83,9666.38 14973.14,9675.7 14973.19,9675.71 ccw(c14962.12,9709.31) 14974.82,9676.29 15002.71,9686.99 ccw(c14993.62,9710.69) 15011.53,9692.71 15023.76,9704.94 ccw(c15020.22,9708.48) 15025.22,9708.48 15025.22,9803.1 15041.24,9819.12 15041.24,10147.71 15040.07,10148.98 v1(15025.12,10169.94)
  Bottom 6+gnd w5: v1(15025.22,9709.31) 15025.22,9771.26 U4.17@15025.36,9771.4
SDNCAS_6: IC1.132 U1.17 U2.17 | length 3066.5
  Top Layer 1 w5: IC1.132@16329.88,11311.57 16330.22,11311.24 16330.22,11257.92 v1(16330.55,11257.59) ; v1(16333.42,10174.13) U1.17@16333.42,10235.97 ; v1@16333.66,10174.38 U1.17@16333.66,10236.22
  Layer 3 w5: 15971.7,10459.17 15971.7,10450.3 15973.2,9713.52 ccw(c16018.57,9713.62) 16018.37,9668.24 16049.79,9668.13 16284.64,9667.93 ; 15971.7,10459.21 15971.72,10470.72 ; 16292.3,9669.38 cw(c16288.82,9672.96) 16288.86,9667.96 16284.75,9667.93 ; 16292.33,9669.4 16333.52,9710.59 16333.52,9813.48 cw(c16338.52,9813.48) 16334.97,9817 16344.79,9826.82 ccw(c16333.91,9837.68) 16344.86,9826.89 16347.84,9829.91 ; v1(16330.55,11257.59) 16271.56,11261.41 ccw(c16270.57,11246.07) 16270.74,11261.44 16225.18,11261.95 ccw(c16225.01,11246.58) 16209.66,11247.44 16207.44,11208.19 cw(c16192.09,11209.06) 16183.42,11196.35 16159.62,11212.73 ccw(c16145.24,11191.83) 16129.75,11211.93 16025.78,11131.98 ccw(c16028.83,11128.01) 16023.83,11128.01 16023.83,10524.89 15973.16,10474.22 ; v1(16333.42,10174.13) 16341.72,10160.47 ; 16349.28,10150.23 16349.28,9833.33 ; 15971.72,10470.72 cw(c15976.72,10470.71) 15973.14,10474.19 ; 15971.72,10470.72 cw(c15976.72,10470.71) 15973.14,10474.19 ; 15971.72,10470.72 cw(c15976.72,10470.71) 15973.14,10474.19 ; 15971.72,10470.72 cw(c15976.72,10470.71) 15973.14,10474.19 ; 15971.72,10470.72 cw(c15976.72,10470.71) 15973.14,10474.19 ; 16284.64,9667.93 ccw(c16284.65,9682.93) 16284.75,9667.93 ; 16284.64,9667.93 ccw(c16284.65,9682.93) 16284.75,9667.93 ; 16284.64,9667.93 ccw(c16284.65,9682.93) 16284.75,9667.93 ; 16284.64,9667.93 ccw(c16284.65,9682.93) 16284.75,9667.93 ; 16284.64,9667.93 ccw(c16284.65,9682.93) 16284.75,9667.93 ; 16284.64,9667.93 ccw(c16284.65,9682.93) 16284.75,9667.93 ; 16284.64,9667.93 ccw(c16284.65,9682.93) 16284.75,9667.93 ; 16284.64,9667.93 ccw(c16284.65,9682.93) 16284.75,9667.93 ; 16284.64,9667.93 ccw(c16284.65,9682.93) 16284.75,9667.93 ; 16284.64,9667.93 ccw(c16284.65,9682.93) 16284.75,9667.93 ; 16284.64,9667.93 ccw(c16284.65,9682.93) 16284.75,9667.93 ; 16284.64,9667.93 ccw(c16284.65,9682.93) 16284.75,9667.93 ; 16284.64,9667.93 ccw(c16284.65,9682.93) 16284.75,9667.93 ; 16284.64,9667.93 ccw(c16284.65,9682.93) 16284.75,9667.93 ; 16284.64,9667.93 ccw(c16284.65,9682.93) 16284.75,9667.93 ; 16284.64,9667.93 ccw(c16284.65,9682.93) 16284.75,9667.93 ; 16341.72,10160.47 ccw(c16354.54,10168.26) 16343.87,10157.71 ; 16341.72,10160.47 ccw(c16354.54,10168.26) 16343.87,10157.71 ; 16341.72,10160.47 ccw(c16354.54,10168.26) 16343.87,10157.71 ; 16341.72,10160.47 ccw(c16354.54,10168.26) 16343.87,10157.71 ; 16341.72,10160.47 ccw(c16354.54,10168.26) 16343.88,10157.71 16347.84,10153.7 ; 16347.84,9829.92 ccw(c16344.28,9833.42) 16349.28,9833.33 ; 16347.84,9829.92 ccw(c16344.28,9833.42) 16349.28,9833.33 ; 16347.84,9829.92 ccw(c16344.28,9833.42) 16349.28,9833.33 ; 16347.84,9829.92 ccw(c16344.28,9833.42) 16349.28,9833.33 ; 16347.84,9829.92 ccw(c16344.28,9833.42) 16349.28,9833.33 ; 16347.84,9829.92 ccw(c16344.28,9833.42) 16349.28,9833.33 ; 16347.84,9829.92 ccw(c16344.28,9833.42) 16349.28,9833.33 ; 16347.84,9829.92 ccw(c16344.28,9833.42) 16349.28,9833.33 ; 16347.84,10153.7 cw(c16344.28,10150.19) 16349.28,10150.28 ; 16347.84,10153.7 cw(c16344.28,10150.19) 16349.28,10150.28 ; 16347.84,10153.7 cw(c16344.28,10150.19) 16349.28,10150.28 ; 16347.84,10153.7 cw(c16344.28,10150.19) 16349.28,10150.28 ; 16347.84,10153.7 cw(c16344.28,10150.19) 16349.28,10150.28 ; 16347.84,10153.7 cw(c16344.28,10150.19) 16349.28,10150.28 ; 16347.84,10153.7 cw(c16344.28,10150.19) 16349.28,10150.28 ; 16347.84,10153.7 cw(c16344.28,10150.19) 16349.28,10150.28 ; 16347.84,10153.7 cw(c16344.28,10150.19) 16349.28,10150.28 ; 16347.84,10153.7 cw(c16344.28,10150.19) 16349.28,10150.28 ; 16347.84,10153.7 cw(c16344.28,10150.19) 16349.28,10150.28 ; 16347.84,10153.7 cw(c16344.28,10150.19) 16349.28,10150.28 ; 16347.84,10153.7 cw(c16344.28,10150.19) 16349.28,10150.28 ; 16347.84,10153.7 cw(c16344.28,10150.19) 16349.28,10150.28 ; 16347.84,10153.7 cw(c16344.28,10150.19) 16349.28,10150.28 ; 16347.84,10153.7 cw(c16344.28,10150.19) 16349.28,10150.28
  Bottom 6+gnd w5: v1(16333.52,9713.5) 16333.52,9775.45 U2.17@16333.66,9775.59
SDNE_0_6: IC1.28 U1.19 | length 1361.9
  Top Layer 1 w5: IC1.28@16015.39,10701.81 16015.91,10701.3 16204.48,10701.3 v1(16204.99,10700.78) ; v1@16270.67,10174.38 U1.19@16270.67,10236.22
  Layer 3 w5: v1(16204.99,10700.78) 16217.59,10675.75 ; v1(16270.42,10174.13) 16270.42,10379.36 ; 16217.59,10675.75 ccw(c16240.24,10687.2) 16229.64,10664.15 ; 16217.59,10675.75 ccw(c16240.24,10687.2) 16229.64,10664.15 ; 16229.64,10664.15 16474.14,10552.57 ; 16270.42,10379.36 cw(c16275.42,10379.36) 16272.12,10383.11 ; 16270.42,10379.36 cw(c16275.42,10379.36) 16272.12,10383.11 ; 16270.42,10379.36 cw(c16275.42,10379.36) 16272.11,10383.1 ; 16270.42,10379.36 cw(c16275.42,10379.36) 16272.11,10383.1 ; 16270.42,10379.36 cw(c16275.42,10379.36) 16272.11,10383.1 ; 16270.42,10379.36 cw(c16275.42,10379.36) 16272.11,10383.1 ; 16270.42,10379.36 cw(c16275.42,10379.36) 16272.11,10383.1 ; 16270.42,10379.36 cw(c16275.42,10379.36) 16272.11,10383.1 ; 16270.42,10379.36 cw(c16275.42,10379.36) 16272.11,10383.1 ; 16270.42,10379.36 cw(c16275.42,10379.36) 16272.11,10383.1 ; 16270.42,10379.36 cw(c16275.42,10379.36) 16272.11,10383.1 ; 16270.42,10379.36 cw(c16275.42,10379.36) 16272.11,10383.1 ; 16270.42,10379.36 cw(c16275.42,10379.36) 16272.11,10383.1 ; 16270.42,10379.36 cw(c16275.42,10379.36) 16272.11,10383.1 ; 16270.42,10379.36 cw(c16275.42,10379.36) 16272.11,10383.1 ; 16270.42,10379.36 cw(c16275.42,10379.36) 16272.11,10383.1 ; 16272.12,10383.11 16319.77,10425.13 cw(c16329.94,10413.6) 16325.29,10428.25 16393.58,10450.53 ; 16393.58,10450.54 ccw(c16370.24,10522.2) 16406.88,10456.34 ; 16393.58,10450.54 ccw(c16370.24,10522.2) 16406.88,10456.34 ; 16393.58,10450.54 ccw(c16370.24,10522.2) 16406.88,10456.34 ; 16393.58,10450.54 ccw(c16370.24,10522.2) 16406.88,10456.34 ; 16393.58,10450.54 ccw(c16370.24,10522.2) 16406.88,10456.34 ; 16393.58,10450.54 ccw(c16370.24,10522.2) 16406.88,10456.34 ; 16393.58,10450.54 ccw(c16370.24,10522.2) 16406.88,10456.34 ; 16393.58,10450.54 ccw(c16370.24,10522.2) 16406.88,10456.34 ; 16406.89,10456.34 16494.6,10505.15 ccw(c16487.13,10518.58) 16498.17,10529.28 16478.8,10549.28 ; 16474.14,10552.57 cw(c16467.76,10538.58) 16478.8,10549.28 ; 16474.14,10552.57 cw(c16467.76,10538.58) 16478.8,10549.28 ; 16474.14,10552.57 cw(c16467.76,10538.58) 16478.8,10549.28 ; 16474.14,10552.57 cw(c16467.76,10538.58) 16478.8,10549.28 ; 16474.14,10552.57 cw(c16467.76,10538.58) 16478.8,10549.28 ; 16474.14,10552.57 cw(c16467.76,10538.58) 16478.8,10549.28 ; 16474.14,10552.57 cw(c16467.76,10538.58) 16478.8,10549.28 ; 16474.14,10552.57 cw(c16467.76,10538.58) 16478.8,10549.28 ; 16474.15,10552.56 cw(c16467.76,10538.58) 16478.8,10549.28 ; 16474.15,10552.56 cw(c16467.76,10538.58) 16478.8,10549.28 ; 16474.15,10552.56 cw(c16467.76,10538.58) 16478.8,10549.28 ; 16474.15,10552.56 cw(c16467.76,10538.58) 16478.8,10549.28 ; 16474.15,10552.56 cw(c16467.76,10538.58) 16478.8,10549.28 ; 16474.15,10552.56 cw(c16467.76,10538.58) 16478.8,10549.28 ; 16474.15,10552.56 cw(c16467.76,10538.58) 16478.8,10549.28 ; 16474.15,10552.56 cw(c16467.76,10538.58) 16478.8,10549.28
SDNE_1_6: IC1.136 U2.19 | length 3410.9
  Top Layer 1 w5: IC1.136@16251.14,11311.57 16252.08,11310.64 16252.08,11228.17 v1(16253.01,11227.23)
  Layer 3 w5: 16117.75,10904.28 ccw(c16121.72,10907.32) 16118.11,10903.85 ; 16118.07,10568.8 16003.14,10453.86 ccw(c16006.72,10450.38) 16001.72,10450.37 16003.2,9713.55 ; 16118.1,10568.83 ccw(c16114.5,10572.3) 16119.5,10572.3 16119.54,10681.98 ; v1(16253.01,11227.23) 16232.2,11187.85 ; 16256.52,9699.59 v1(16270.42,9713.5) ; 16003.2,9713.55 ccw(c16018.57,9713.62) 16018.52,9698.24 ; 16003.2,9713.55 ccw(c16018.57,9713.62) 16018.52,9698.24 ; 16003.2,9713.55 ccw(c16018.57,9713.62) 16018.52,9698.24 ; 16003.2,9713.55 ccw(c16018.57,9713.62) 16018.52,9698.24 ; 16003.2,9713.55 ccw(c16018.57,9713.62) 16018.52,9698.24 ; 16003.2,9713.55 ccw(c16018.57,9713.62) 16018.52,9698.24 ; 16003.2,9713.55 ccw(c16018.57,9713.62) 16018.52,9698.24 ; 16003.2,9713.55 ccw(c16018.57,9713.62) 16018.52,9698.24 ; 16003.2,9713.55 ccw(c16018.57,9713.62) 16018.52,9698.24 ; 16003.2,9713.55 ccw(c16018.57,9713.62) 16018.52,9698.24 ; 16003.2,9713.55 ccw(c16018.57,9713.62) 16018.52,9698.24 ; 16003.2,9713.55 ccw(c16018.57,9713.62) 16018.52,9698.24 ; 16003.2,9713.55 ccw(c16018.57,9713.62) 16018.52,9698.24 ; 16003.2,9713.55 ccw(c16018.57,9713.62) 16018.52,9698.24 ; 16003.2,9713.55 ccw(c16018.57,9713.62) 16018.52,9698.24 ; 16003.2,9713.55 ccw(c16018.57,9713.62) 16018.52,9698.24 ; 16018.52,9698.24 16049.9,9698.13 16238.93,9698.13 16253.02,9698.16 ; 16063.87,10979.7 ccw(c16079.21,10978.64) 16067.08,10969.2 ; 16063.87,10979.7 ccw(c16079.21,10978.64) 16067.08,10969.2 ; 16063.87,10979.7 ccw(c16079.21,10978.64) 16067.08,10969.2 ; 16063.87,10979.7 ccw(c16079.21,10978.64) 16067.08,10969.2 ; 16063.87,10979.7 ccw(c16079.21,10978.64) 16067.08,10969.2 ; 16063.87,10979.7 ccw(c16079.21,10978.64) 16067.08,10969.2 ; 16063.87,10979.7 ccw(c16079.21,10978.64) 16067.08,10969.2 ; 16063.87,10979.7 ccw(c16079.21,10978.64) 16067.08,10969.2 ; 16063.87,10979.7 ccw(c16079.21,10978.64) 16067.08,10969.2 ; 16063.87,10979.7 ccw(c16079.21,10978.64) 16067.08,10969.2 ; 16063.87,10979.7 ccw(c16079.21,10978.64) 16067.08,10969.2 ; 16063.87,10979.7 ccw(c16079.21,10978.64) 16067.08,10969.2 ; 16063.87,10979.7 ccw(c16079.21,10978.64) 16067.08,10969.2 ; 16063.87,10979.7 ccw(c16079.21,10978.64) 16067.08,10969.2 ; 16063.87,10979.7 ccw(c16079.21,10978.64) 16067.08,10969.2 ; 16063.87,10979.7 ccw(c16079.21,10978.64) 16067.08,10969.2 ; 16063.87,10979.7 16068.03,11039.79 cw(c16093.35,11038.08) 16068.16,11041.2 16073.91,11087.65 cw(c16089.16,11085.73) 16079.05,11097.31 16115.14,11128.8 16138.43,11149.07 ; 16067.08,10969.19 16117.75,10904.27 ; 16117.75,10904.27 ccw(c16121.72,10907.32) 16118.11,10903.85 ; 16117.75,10904.27 ccw(c16121.72,10907.32) 16118.11,10903.85 ; 16117.75,10904.27 ccw(c16121.72,10907.32) 16118.11,10903.85 ; 16117.75,10904.27 ccw(c16121.72,10907.32) 16118.11,10903.85 ; 16118.11,10903.85 cw(c16114.49,10900.41) 16119.49,10900.41 16119.54,10682.21 ; 16119.53,10681.98 ccw(c16094.16,10682.09) 16119.53,10682.21 ; 16119.53,10681.98 ccw(c16094.16,10682.09) 16119.53,10682.2 ; 16119.53,10681.98 ccw(c16094.16,10682.09) 16119.53,10682.2 ; 16119.53,10681.98 ccw(c16094.16,10682.09) 16119.53,10682.2 ; 16119.53,10681.98 ccw(c16094.16,10682.09) 16119.53,10682.2 ; 16138.43,11149.07 cw(c16148.55,11137.5) 16145.34,11152.53 ; 16138.43,11149.07 cw(c16148.55,11137.5) 16145.34,11152.53 ; 16138.43,11149.07 cw(c16148.55,11137.5) 16145.34,11152.53 ; 16138.43,11149.07 cw(c16148.55,11137.5) 16145.34,11152.53 ; 16138.43,11149.07 cw(c16148.55,11137.5) 16145.34,11152.53 ; 16138.43,11149.07 cw(c16148.55,11137.5) 16145.34,11152.53 ; 16138.43,11149.07 cw(c16148.55,11137.5) 16145.34,11152.53 ; 16138.43,11149.07 cw(c16148.55,11137.5) 16145.34,11152.53 ; 16138.43,11149.07 cw(c16148.55,11137.5) 16145.34,11152.53 ; 16138.43,11149.07 cw(c16148.55,11137.5) 16145.34,11152.53 ; 16138.43,11149.07 cw(c16148.55,11137.5) 16145.34,11152.53 ; 16138.43,11149.07 cw(c16148.55,11137.5) 16145.34,11152.53 ; 16138.43,11149.07 cw(c16148.55,11137.5) 16145.34,11152.53 ; 16138.43,11149.07 cw(c16148.55,11137.5) 16145.34,11152.53 ; 16138.43,11149.07 cw(c16148.55,11137.5) 16145.34,11152.53 ; 16138.43,11149.07 cw(c16148.55,11137.5) 16145.34,11152.53 ; 16145.35,11152.53 16201.67,11164.7 ; 16201.67,11164.7 ccw(c16192.09,11209.06) 16232.2,11187.85 ; 16201.67,11164.7 ccw(c16192.09,11209.06) 16232.2,11187.85 ; 16201.67,11164.7 ccw(c16192.09,11209.06) 16232.2,11187.85 ; 16201.67,11164.7 ccw(c16192.09,11209.06) 16232.2,11187.86 ; 16201.67,11164.7 ccw(c16192.09,11209.06) 16232.2,11187.85 ; 16201.67,11164.7 ccw(c16192.09,11209.06) 16232.2,11187.85 ; 16201.67,11164.7 ccw(c16192.09,11209.06) 16232.2,11187.85 ; 16201.67,11164.7 ccw(c16192.09,11209.06) 16232.2,11187.85 ; 16201.67,11164.7 ccw(c16192.09,11209.06) 16232.2,11187.85 ; 16201.67,11164.7 ccw(c16192.09,11209.06) 16232.2,11187.85 ; 16201.67,11164.7 ccw(c16192.09,11209.06) 16232.2,11187.85 ; 16201.67,11164.7 ccw(c16192.09,11209.06) 16232.2,11187.85 ; 16201.67,11164.7 ccw(c16192.09,11209.06) 16232.2,11187.85 ; 16201.67,11164.7 ccw(c16192.09,11209.06) 16232.2,11187.85 ; 16201.67,11164.7 ccw(c16192.09,11209.06) 16232.2,11187.85 ; 16201.67,11164.7 ccw(c16192.09,11209.06) 16232.2,11187.85 ; 16253.02,9698.16 ccw(c16253.01,9703.16) 16256.49,9699.57 ; 16253.02,9698.16 ccw(c16253.01,9703.16) 16256.49,9699.57 ; 16253.02,9698.16 ccw(c16253.01,9703.16) 16256.49,9699.57 ; 16253.02,9698.16 ccw(c16253.01,9703.16) 16256.49,9699.57 ; 16253.02,9698.16 ccw(c16253.01,9703.16) 16256.49,9699.57 ; 16253.02,9698.16 ccw(c16253.01,9703.16) 16256.49,9699.57 ; 16253.02,9698.16 ccw(c16253.01,9703.16) 16256.49,9699.57 ; 16253.02,9698.16 ccw(c16253.01,9703.16) 16256.49,9699.57 ; 16253.02,9698.16 ccw(c16253.01,9703.16) 16256.49,9699.57 ; 16253.02,9698.16 ccw(c16253.01,9703.16) 16256.49,9699.57 ; 16253.02,9698.16 ccw(c16253.01,9703.16) 16256.49,9699.57 ; 16253.02,9698.16 ccw(c16253.01,9703.16) 16256.49,9699.57 ; 16253.02,9698.16 ccw(c16253.01,9703.16) 16256.49,9699.57 ; 16253.02,9698.16 ccw(c16253.01,9703.16) 16256.49,9699.57 ; 16253.02,9698.16 ccw(c16253.01,9703.16) 16256.49,9699.57 ; 16253.02,9698.16 ccw(c16253.01,9703.16) 16256.49,9699.57
  Bottom 6+gnd w5: v1@16270.67,9713.75 U2.19@16270.67,9775.59
SDNE_01_7: IC2.44 U3.19 | length 1671.3
  Top Layer 1 w5: IC2.44@14923.31,10461.71 v1@14923.31,10534.31 ; v1@14962.37,10170.19 U3.19@14962.37,10232.03
  Layer 3 w5: v1(14923.24,10534.39) 15039.34,10549.64 ; v1(14962.12,10169.94) 14962.12,10396.01 ; 15039.39,10549.64 15117.86,10559.87 ; 14962.12,10396.01 cw(c14967.12,10396.01) 14965.05,10400.56 ; 14962.12,10396.01 cw(c14967.12,10396.01) 14965.04,10400.55 ; 14962.12,10396.01 cw(c14967.12,10396.01) 14965.04,10400.55 ; 14962.12,10396.01 cw(c14967.12,10396.01) 14965.04,10400.55 ; 14962.12,10396.01 cw(c14967.12,10396.01) 14965.03,10400.55 ; 14962.12,10396.01 cw(c14967.12,10396.01) 14965.03,10400.55 ; 14962.12,10396.01 cw(c14967.12,10396.01) 14965.03,10400.55 ; 14962.12,10396.01 cw(c14967.12,10396.01) 14965.03,10400.55 ; 14962.12,10396.01 cw(c14967.12,10396.01) 14965.03,10400.55 ; 14962.12,10396.01 cw(c14967.12,10396.01) 14965.03,10400.55 ; 14962.12,10396.01 cw(c14967.12,10396.01) 14965.03,10400.55 ; 14962.12,10396.01 cw(c14967.12,10396.01) 14965.03,10400.55 ; 14962.12,10396.01 cw(c14967.12,10396.01) 14965.03,10400.55 ; 14962.12,10396.01 cw(c14967.12,10396.01) 14965.03,10400.55 ; 14962.12,10396.01 cw(c14967.12,10396.01) 14965.03,10400.55 ; 14962.12,10396.01 cw(c14967.12,10396.01) 14965.03,10400.55 ; 14965.05,10400.56 15015.25,10423.39 ; 15015.25,10423.39 cw(c15021.64,10409.41) 15015.67,10423.58 ; 15015.25,10423.39 cw(c15021.64,10409.41) 15015.66,10423.58 ; 15015.25,10423.39 cw(c15021.64,10409.41) 15015.66,10423.58 ; 15015.25,10423.39 cw(c15021.64,10409.41) 15015.66,10423.58 ; 15015.25,10423.39 cw(c15021.64,10409.41) 15015.66,10423.58 ; 15015.25,10423.39 cw(c15021.64,10409.41) 15015.66,10423.58 ; 15015.25,10423.39 cw(c15021.64,10409.41) 15015.66,10423.58 ; 15015.25,10423.39 cw(c15021.64,10409.41) 15015.66,10423.58 ; 15015.25,10423.39 cw(c15021.64,10409.41) 15015.66,10423.58 ; 15015.25,10423.39 cw(c15021.64,10409.41) 15015.66,10423.58 ; 15015.25,10423.39 cw(c15021.64,10409.41) 15015.66,10423.58 ; 15015.25,10423.39 cw(c15021.64,10409.41) 15015.66,10423.58 ; 15015.25,10423.39 cw(c15021.64,10409.41) 15015.66,10423.58 ; 15015.25,10423.39 cw(c15021.64,10409.41) 15015.66,10423.58 ; 15015.25,10423.39 cw(c15021.64,10409.41) 15015.66,10423.58 ; 15015.25,10423.39 cw(c15021.64,10409.41) 15015.66,10423.58 ; 15015.67,10423.58 15087.82,10454.57 ; 15087.82,10454.57 ccw(c15062,10514.63) 15089.85,10455.49 ; 15087.82,10454.57 ccw(c15062,10514.63) 15089.85,10455.49 ; 15087.82,10454.57 ccw(c15062,10514.63) 15089.85,10455.49 ; 15087.82,10454.57 ccw(c15062,10514.63) 15089.85,10455.49 ; 15087.82,10454.57 ccw(c15062,10514.63) 15089.85,10455.49 ; 15089.85,10455.49 15185.38,10500.48 ; 15117.86,10559.87 cw(c15119.85,10544.63) 15123.7,10559.51 ; 15117.86,10559.87 cw(c15119.85,10544.63) 15123.7,10559.51 ; 15117.86,10559.87 cw(c15119.85,10544.63) 15123.7,10559.51 ; 15117.86,10559.87 cw(c15119.85,10544.63) 15123.7,10559.51 ; 15117.86,10559.87 cw(c15119.85,10544.63) 15123.7,10559.51 ; 15117.86,10559.87 cw(c15119.85,10544.63) 15123.7,10559.51 ; 15117.86,10559.87 cw(c15119.85,10544.63) 15123.7,10559.51 ; 15117.86,10559.87 cw(c15119.85,10544.63) 15123.7,10559.51 ; 15117.86,10559.87 cw(c15119.85,10544.63) 15123.7,10559.51 ; 15117.86,10559.87 cw(c15119.85,10544.63) 15123.7,10559.51 ; 15117.86,10559.87 cw(c15119.85,10544.63) 15123.7,10559.51 ; 15117.86,10559.87 cw(c15119.85,10544.63) 15123.7,10559.51 ; 15117.86,10559.87 cw(c15119.85,10544.63) 15123.7,10559.51 ; 15117.86,10559.87 cw(c15119.85,10544.63) 15123.7,10559.51 ; 15117.86,10559.87 cw(c15119.85,10544.63) 15123.7,10559.51 ; 15117.86,10559.87 cw(c15119.85,10544.63) 15123.7,10559.51 ; 15123.7,10559.51 15163.3,10549.28 ; 15163.3,10549.28 cw(c15159.46,10534.39) 15170.5,10545.09 ; 15163.3,10549.28 cw(c15159.46,10534.39) 15170.5,10545.09 ; 15163.3,10549.28 cw(c15159.46,10534.39) 15170.5,10545.09 ; 15163.3,10549.28 cw(c15159.46,10534.39) 15170.5,10545.09 ; 15163.3,10549.28 cw(c15159.46,10534.39) 15170.5,10545.09 ; 15163.3,10549.28 cw(c15159.46,10534.39) 15170.5,10545.09 ; 15163.3,10549.28 cw(c15159.46,10534.39) 15170.5,10545.09 ; 15163.3,10549.28 cw(c15159.46,10534.39) 15170.5,10545.09 ; 15163.3,10549.28 cw(c15159.46,10534.39) 15170.5,10545.09 ; 15163.3,10549.28 cw(c15159.46,10534.39) 15170.5,10545.09 ; 15163.3,10549.28 cw(c15159.46,10534.39) 15170.5,10545.09 ; 15163.3,10549.28 cw(c15159.46,10534.39) 15170.5,10545.09 ; 15163.3,10549.28 cw(c15159.46,10534.39) 15170.5,10545.09 ; 15163.3,10549.28 cw(c15159.46,10534.39) 15170.5,10545.09 ; 15163.3,10549.28 cw(c15159.46,10534.39) 15170.5,10545.09 ; 15163.3,10549.28 cw(c15159.46,10534.39) 15170.5,10545.09 ; 15170.5,10545.09 15189.87,10525.09 ; 15185.38,10500.48 ccw(c15178.83,10514.39) 15189.87,10525.09 ; 15185.38,10500.48 ccw(c15178.83,10514.39) 15189.87,10525.09 ; 15185.38,10500.48 ccw(c15178.83,10514.39) 15189.87,10525.09 ; 15185.38,10500.48 ccw(c15178.83,10514.39) 15189.87,10525.09 ; 15185.38,10500.48 ccw(c15178.83,10514.39) 15189.87,10525.09 ; 15185.38,10500.48 ccw(c15178.83,10514.39) 15189.87,10525.09 ; 15185.38,10500.48 ccw(c15178.83,10514.39) 15189.87,10525.09 ; 15185.38,10500.48 ccw(c15178.83,10514.39) 15189.87,10525.09 ; 15185.38,10500.48 ccw(c15178.83,10514.39) 15189.87,10525.09 ; 15185.38,10500.48 ccw(c15178.83,10514.39) 15189.87,10525.09 ; 15185.38,10500.48 ccw(c15178.83,10514.39) 15189.87,10525.09 ; 15185.38,10500.48 ccw(c15178.83,10514.39) 15189.87,10525.09 ; 15185.38,10500.48 ccw(c15178.83,10514.39) 15189.87,10525.09 ; 15185.38,10500.48 ccw(c15178.83,10514.39) 15189.87,10525.09 ; 15185.38,10500.48 ccw(c15178.83,10514.39) 15189.87,10525.09 ; 15185.38,10500.48 ccw(c15178.83,10514.39) 15189.87,10525.09
SDNE_11_7: IC2.136 U4.19 | length 2128.5
  Top Layer 1 w5: IC2.136@14942.84,11307.38 14943.67,11306.55 14943.67,11235.13 v1(14944.5,11234.3)
  Layer 3 w5: 14867.64,9693.94 14741.6,9693.94 14710.41,9694.05 14710.22,9694.05 cw(c14710.27,9709.43) 14694.9,9709.4 14693.42,10445.04 cw(c14698.42,10445.04) 14694.89,10448.57 14736.05,10489.7 cw(c14746.65,10479.09) 14736.84,10490.44 14788.85,10535.42 ccw(c14765.72,10562.18) 14800.96,10559.1 14811.14,10675.69 ccw(c14785.86,10677.89) 14811.16,10675.91 14811.17,10676.06 ccw(c14785.86,10677.9) 14811.24,10677.9 14811.24,10815.26 14811.23,10855.29 ccw(c14785.86,10855.26) 14806.95,10869.37 14740.69,10968.94 cw(c14744.85,10971.71) 14739.85,10971.71 14739.85,11090.76 cw(c14744.85,11090.76) 14741.31,11094.3 14810.29,11163.27 14873.47,11163.27 v1(14944.5,11234.3) ; 14867.68,9693.94 14930.71,9694.1 ccw(c14930.63,9709.47) 14938.05,9696 v1(14962.12,9709.31)
  Bottom 6+gnd w5: v1@14962.37,9709.56 U4.19@14962.37,9771.4